# Altium PCB MCU Module V1.1(ASCII).PcbDoc
Units mm, origin at the board's own origin, x right, y up, seen from the top; angles counter-clockwise.
Board outline 50 x 50 mm, 4 copper layers (Top Layer, Layer 1, Layer 2, Bottom Layer), stack 1.57 mm thick; 48 components, 129 nets, 368 pads, 208 vias.
Unrouted connection lines stored in the file: 1.
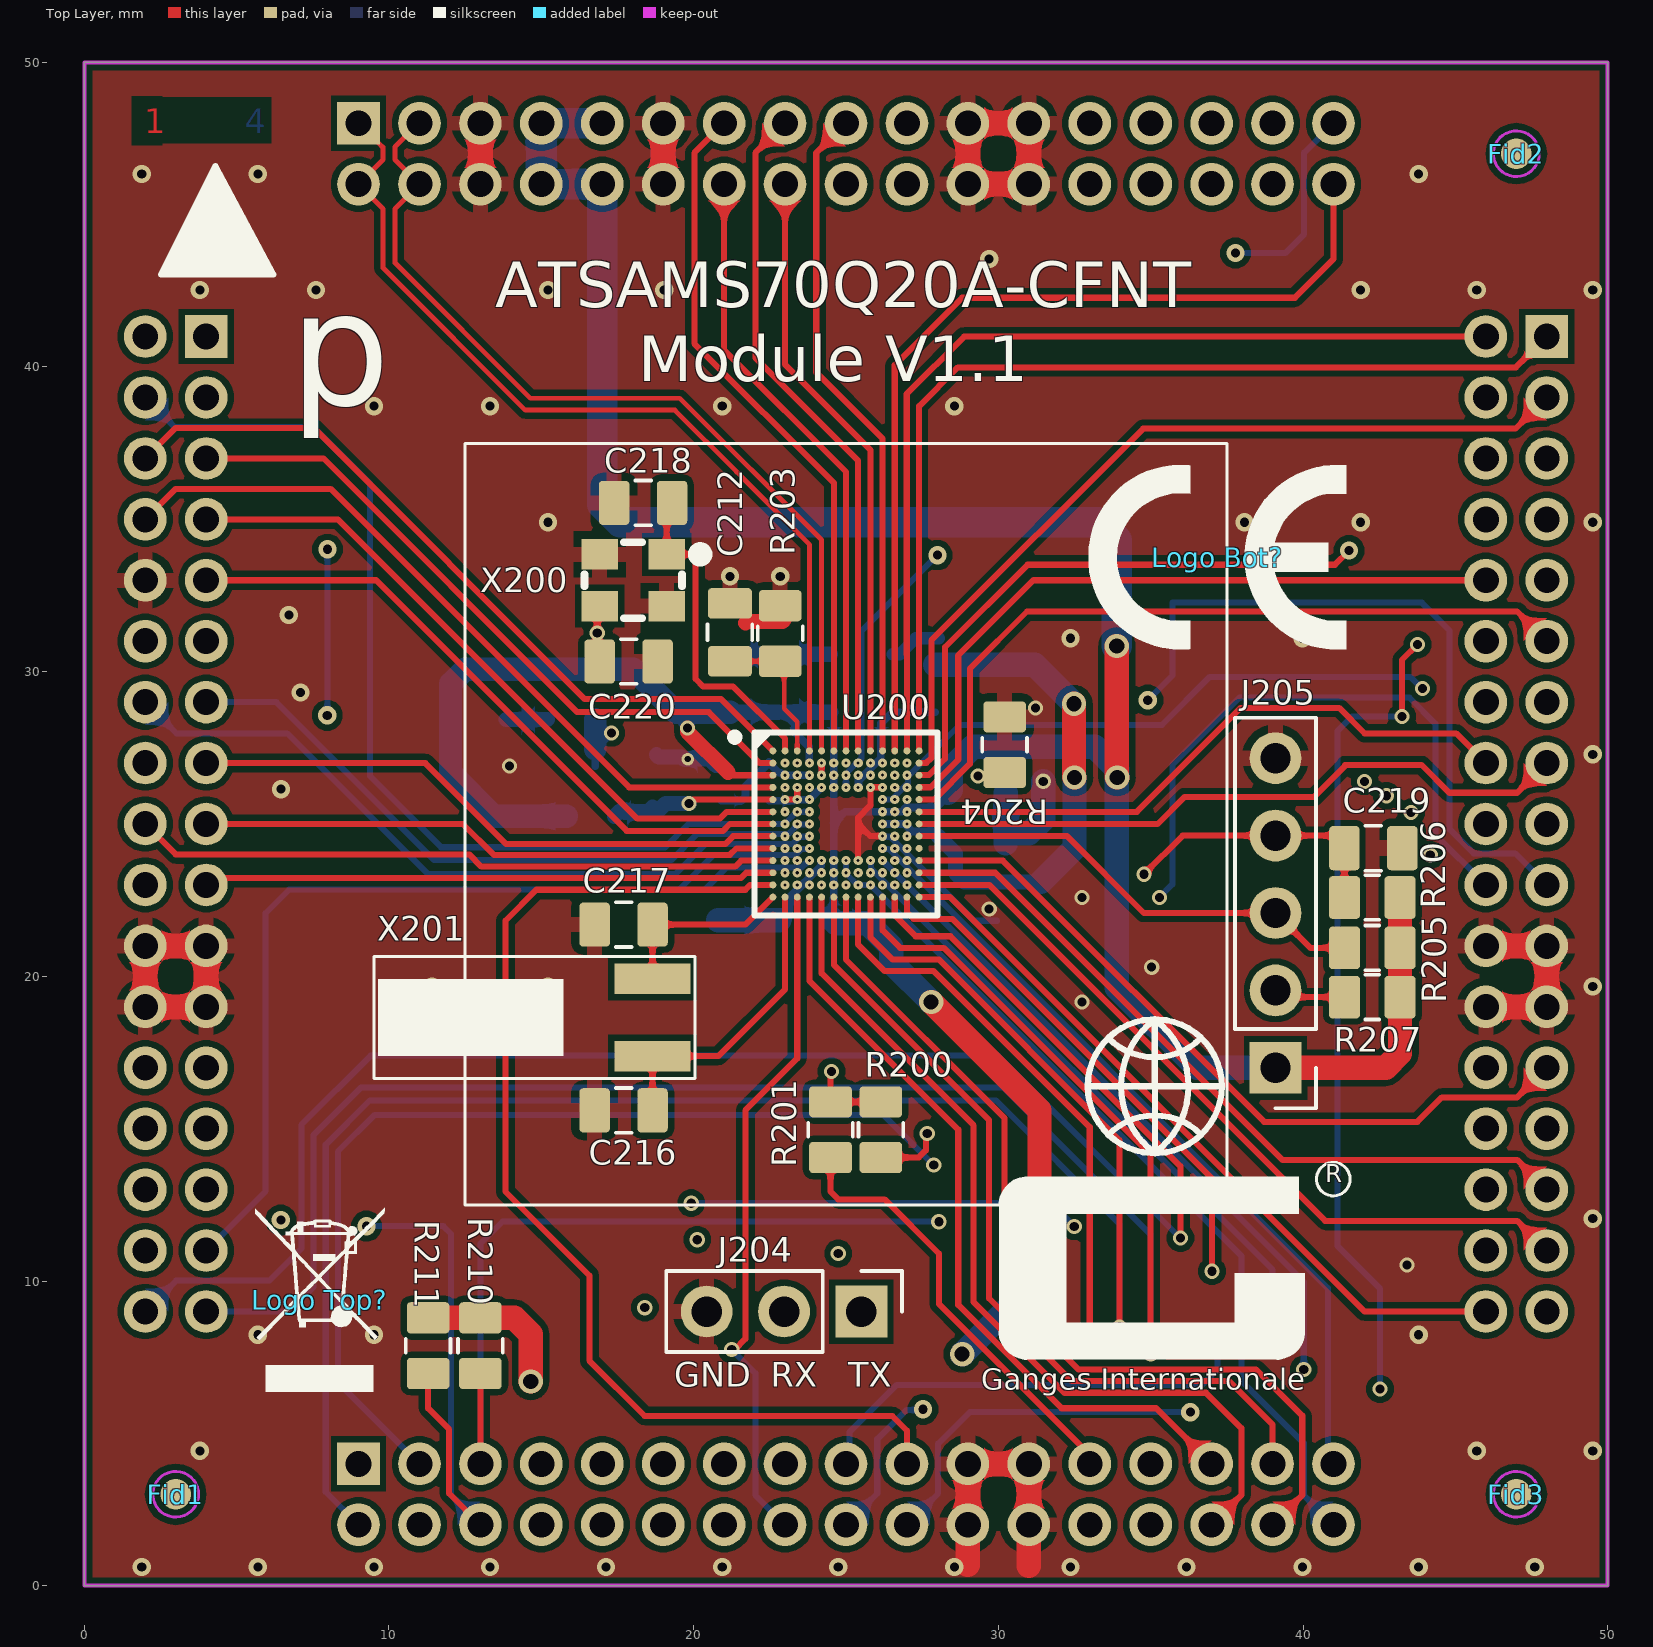
[diagram p0: Top Layer view]
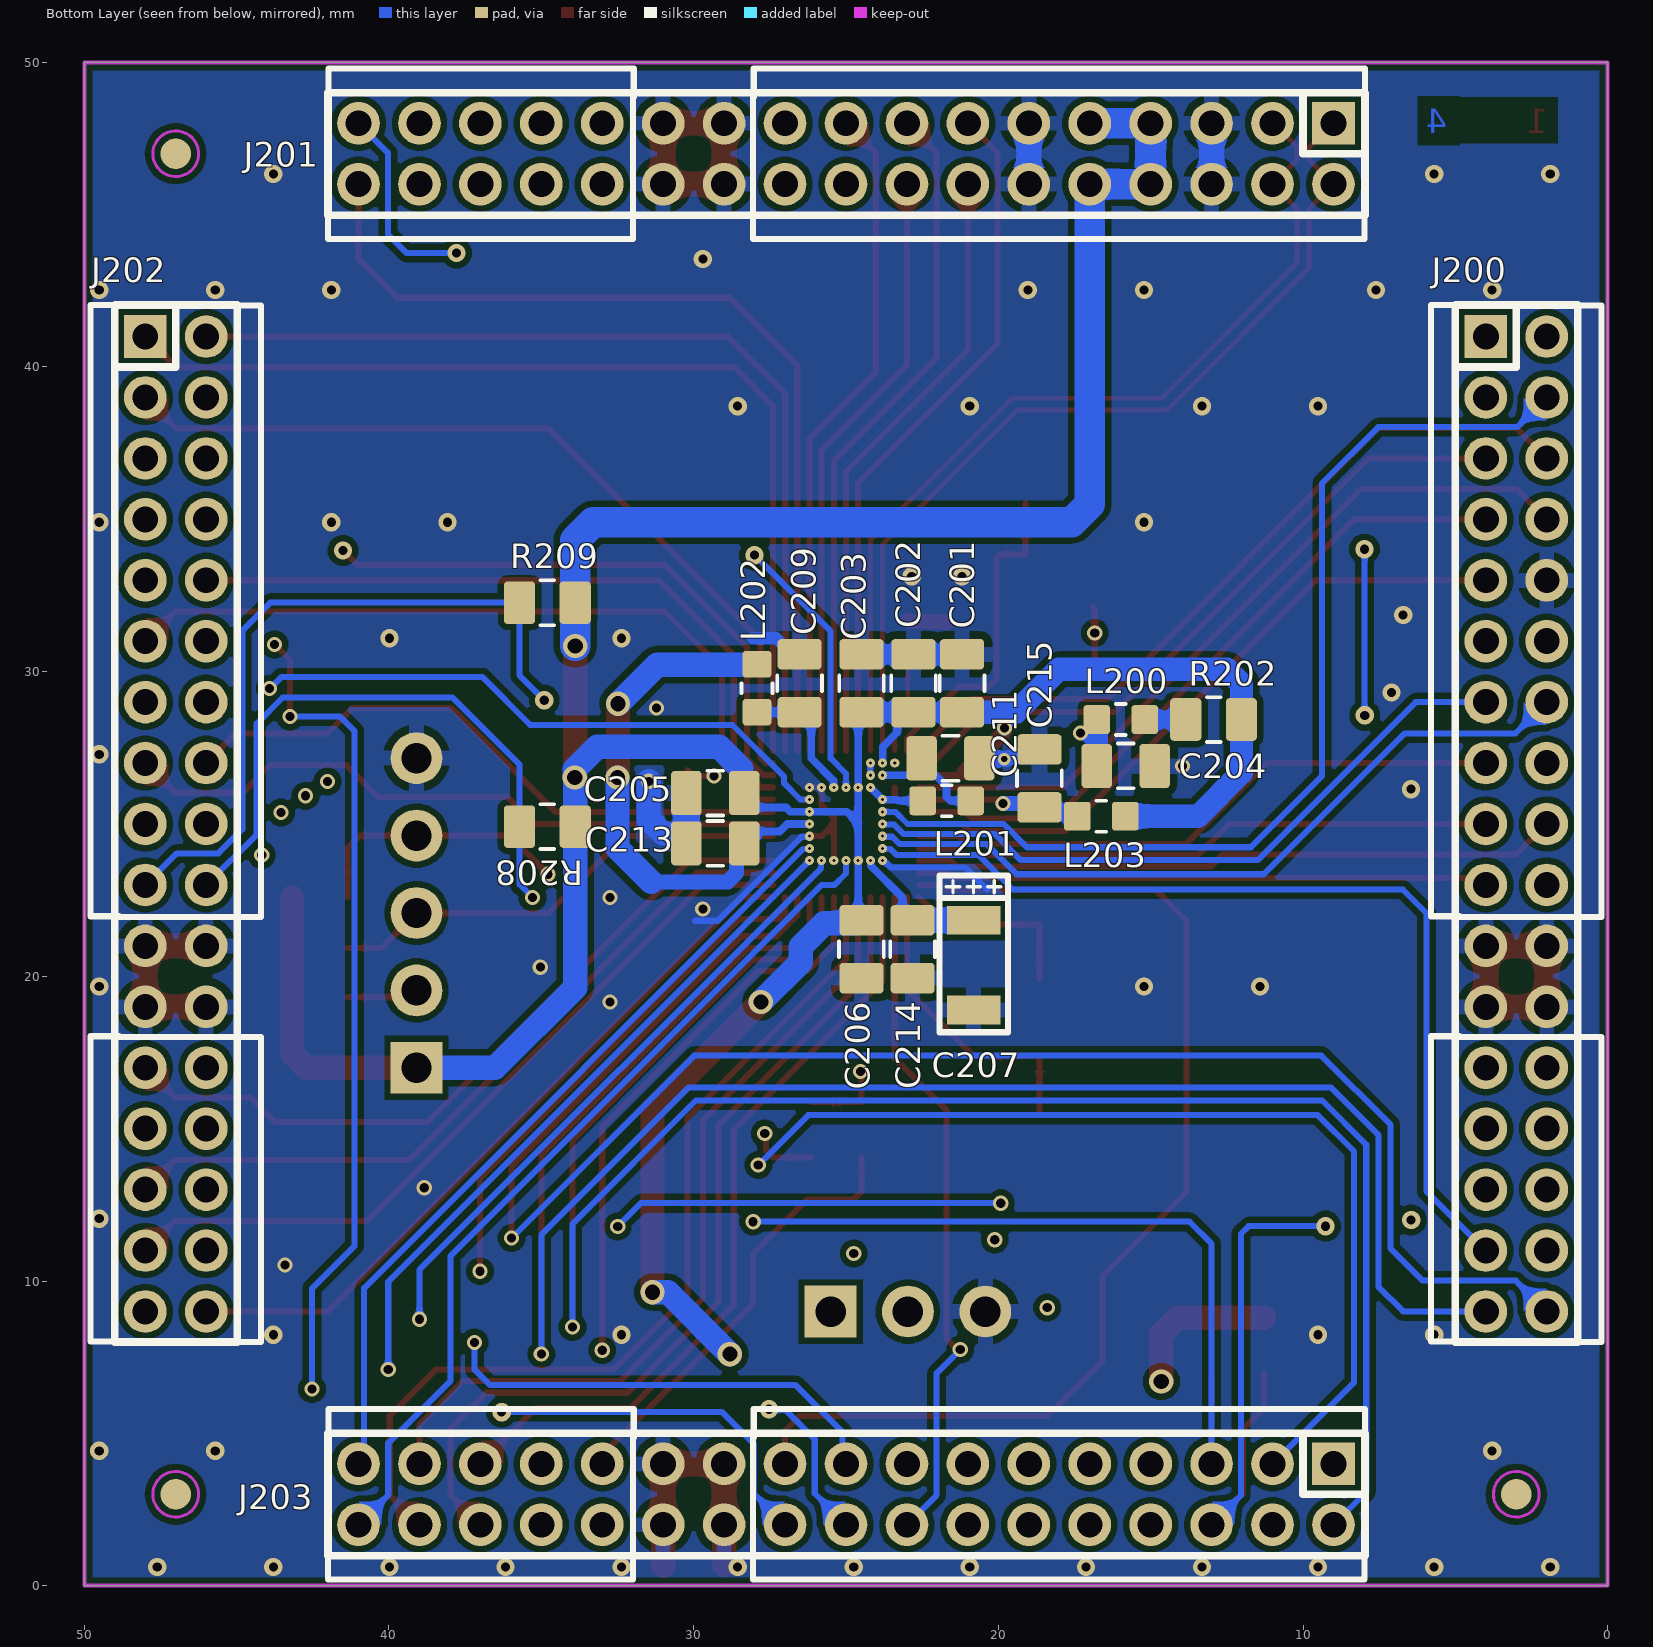
[diagram p1: Bottom Layer view, seen from below]
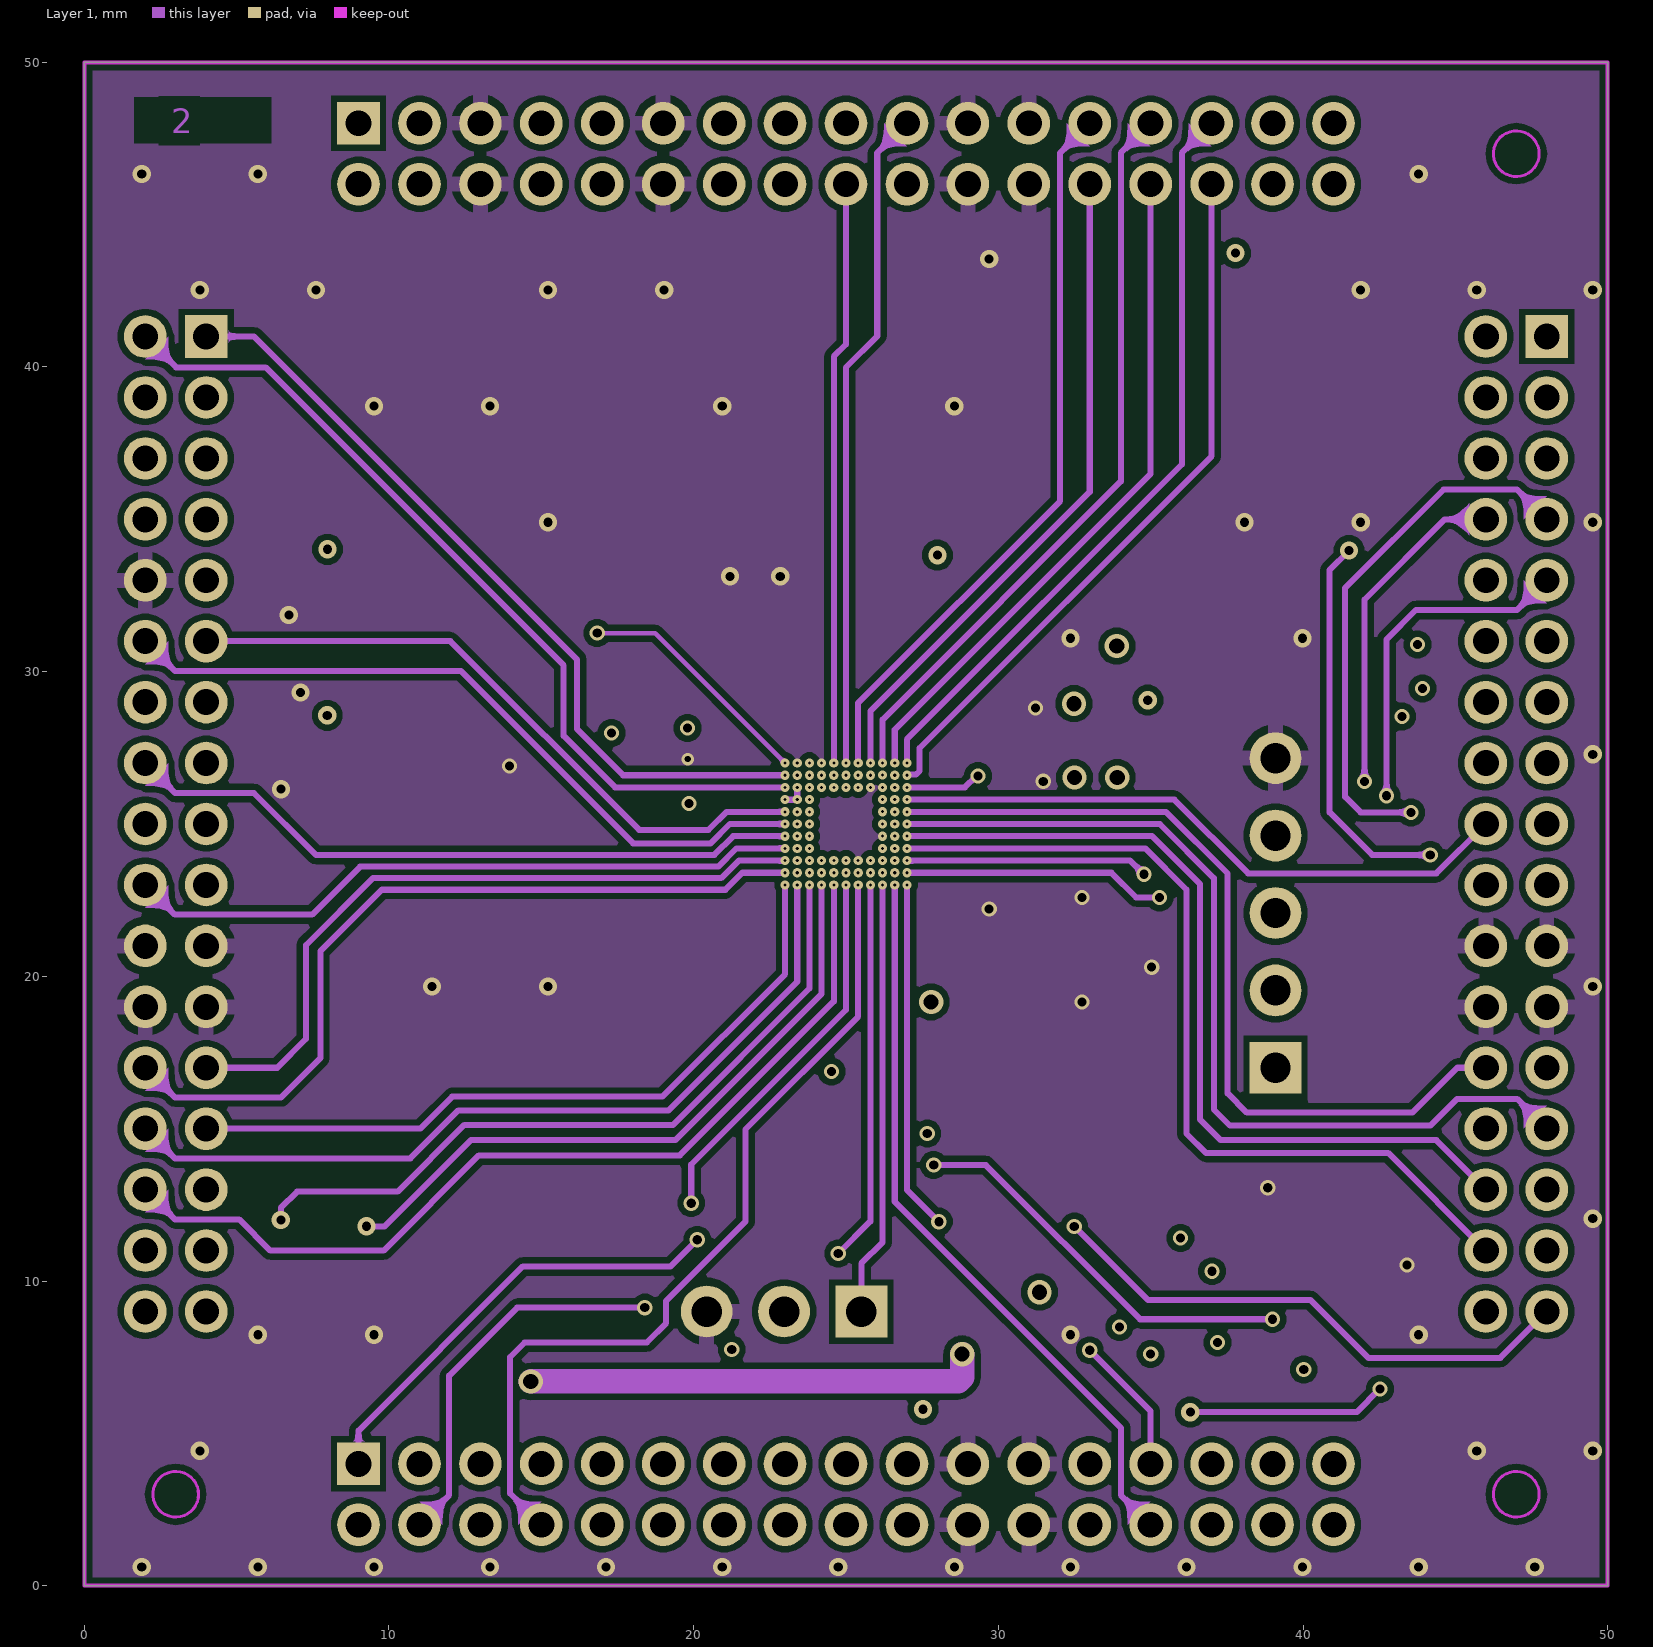
[diagram p2: Layer 1]
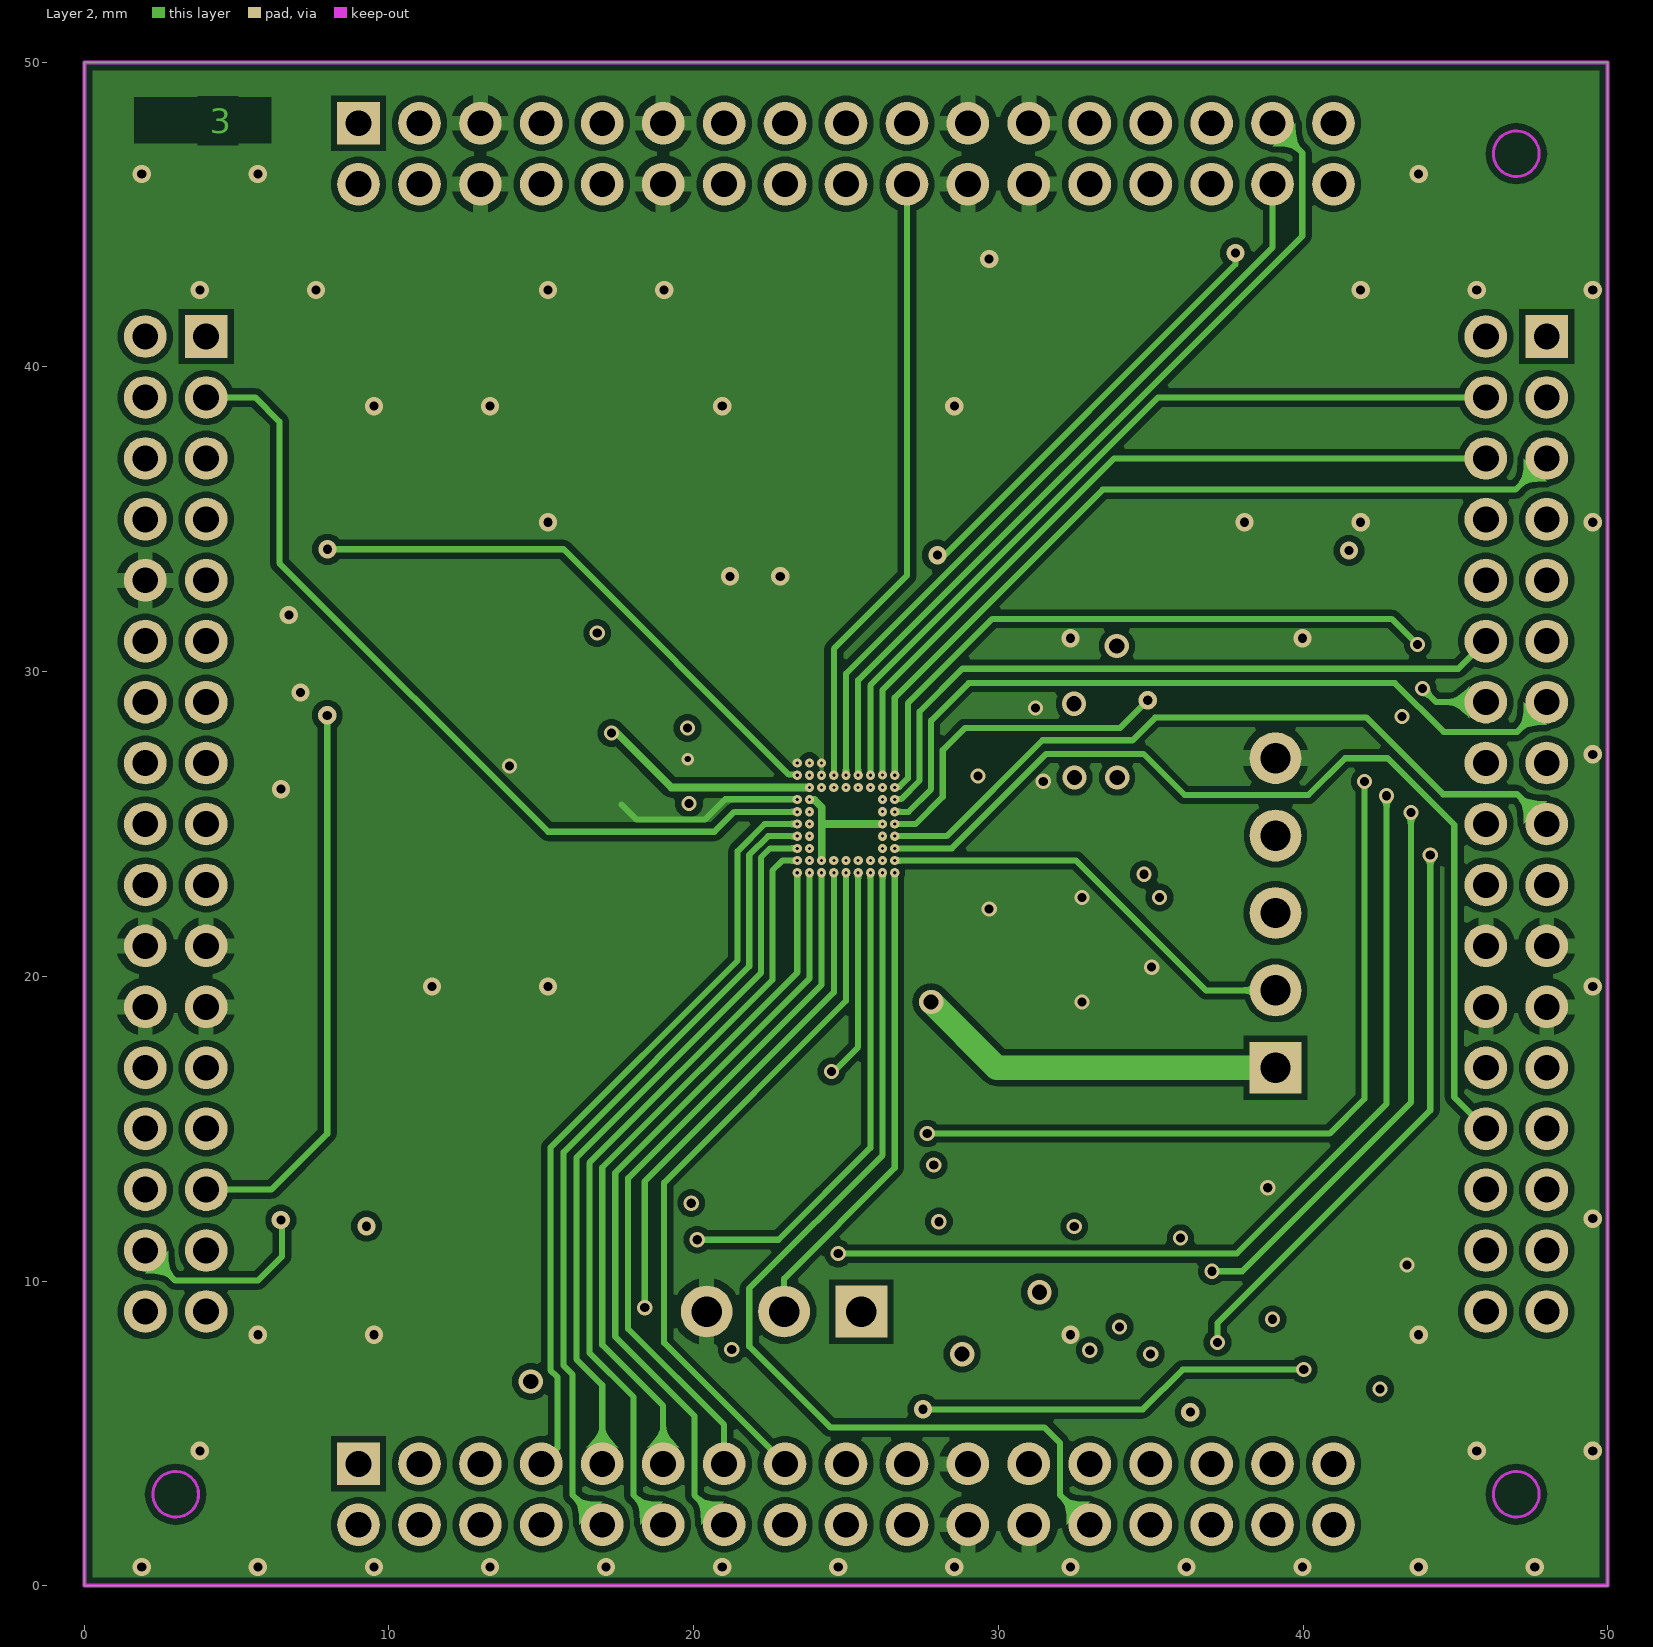
[diagram p3: Layer 2]

## Layer stack, top to bottom
Top Solder: solder mask 0.0127, Solder Resist, Dk 3.8
Top Layer: signal copper 0.035
Dielectric 2: prepreg 0.0175, PP-006, Dk 4.6
Layer 1: signal copper 0.2
Dielectric 1: dielectric 1.065, FR-4, Dk 4.6
Layer 2: signal copper 0.2
Dielectric 3: prepreg 0.0175, PP-006, Dk 4.6
Bottom Layer: signal copper 0.035
Bottom Solder: solder mask 0.0127, Solder Resist, Dk 3.8

## Board outline
0,0 0,50 50,50 50,0

## Design rules (kind name [scope] priority, off if disabled: settings)
Clearance Clearance_microvia [AsMM(ViaDiameter) = 0.3 vs AsMM(ViaDiameter) = 0.3] p1: gap=0.1 ignorepadtopadclearanceinfootprint=FALSE
Clearance Polygon_ANT [(InNamedPolygon('Top_Layer-GND')) or  (InNamedPolygon('Mid_Layer_1-GND')) or (InNamedPolygon('Mid_Layer_2-GND')) or (InNamedPolygon('Bottom_Layer-GND')) vs InNet('RF')] p2: gap=0.127 ignorepadtopadclearanceinfootprint=FALSE except(0: Arc-Hole Track-Hole SMDPad-Hole THPad-Hole Via-Hole Fill-Hole Poly-Hole Region-Hole Text-Hole)
Clearance Polygon [(InNamedPolygon('GND_L01_P000')) or  (InNamedPolygon('GND_L02_P001')) or (InNamedPolygon('GND_L03_P002')) or (InNamedPolygon('GND_L04_P003'))] p3: gap=0.2 ignorepadtopadclearanceinfootprint=FALSE
Clearance Clearance_Top [OnTopLayer] p4: gap=0.15 ignorepadtopadclearanceinfootprint=FALSE except(0.11: Arc-Via Track-Via; 0.12: Arc-Arc Arc-Track Track-Track; 0.13: SMDPad-Via)
Clearance [All] p5: gap=0.15 ignorepadtopadclearanceinfootprint=FALSE except(0.11: Arc-Via Track-Via; 0.12: Arc-Arc Arc-Track Track-Track)
ComponentClearance [All] p1 off: gap=0.254 collisioncheckmode=3 verticalgap=0.254 showdistances=FALSE
DiffPairsRouting DiffPairsRouting90 [All] p1: maxlimit=0.253 minlimit=0.253 mostfreqgap=0.253 toplayer_minwidth=0.139 toplayer_maxwidth=0.139 toplayer_prefwidth=0.139 midlayer1_minwidth=0.139 midlayer1_maxwidth=0.139 midlayer1_prefwidth=0.139 midlayer2_minwidth=0.139 midlayer2_maxwidth=0.139 midlayer2_prefwidth=0.139 bottomlayer_minwidth=0.139 bottomlayer_maxwidth=0.139 bottomlayer_prefwidth=0.139 maxuncoupledlength=12.7
FabricationTestPointUsage TestPointUsage [All] p1: valid=0 allowmultiple=FALSE
FabricationTestpoint Testpoint [All] p1: side=3 testpointundercomponent=TRUE minsize=1.016 maxsize=2.54 preferedsize=1.524 minholesize=0 maxholesize=1.016 preferedholesize=0.813 testpointgrid=0.025 allowsidetop=TRUE allowsidebottom=TRUE usegrid=TRUE gridtolerance=0
Height [All] p1 off: minheight=0 maxheight=25.4 prefheight=12.7
HoleSize [All] p1: absolutevalues=TRUE maxlimit=4.064 minlimit=0.1 maxpercent=80.000 minpercent=20.000
MinimumAnnularRing [All] p1 off: minimumring=0.152
MinimumSolderMaskSliver [All] p1: minsoldermaskwidth=0
PolygonConnect PolygonConnect_1 [isVia and innet(gnd)] p1: connectstyle=Direct reliefconductorwidth=0.254 reliefentries=4 polygonreliefangle="90 Angle" airgapwidth=0.254
PolygonConnect [All] p2: connectstyle=Relief reliefconductorwidth=0.508 reliefentries=4 polygonreliefangle="90 Angle" airgapwidth=0.254
RoomDefinition "MCU Module V1.1" [InComponentClass('MCU Module V1.1')] p1: confinementstyle=ConfineIn formatcopy=TRUE lockcomponents=FALSE outline -0.654,-0.4 50.908,-0.4 50.908,51.035 -0.654,51.035
RoutingVias [All] p1: holewidth=0.305 width=0.61 viastyle="Through Hole" minholewidth=0.3 minwidth=0.6 maxholewidth=0.7 maxwidth=1.27
SilkToSilkClearance [All] p1: silktosilkclearance=0
SilkToSolderMaskClearance SilkscreenOverComponentPads [IsPad] p1: minsilkscreentomaskgap=0 clearancetoexposedcopper=TRUE
SolderMaskExpansion SolderMaskExpansion_via [IsVia] p1: expansion=0.076 istentingtop=TRUE
SolderMaskExpansion [All] p2: expansion=0.076 istentingtop=FALSE
UnRoutedNet [All] p1: checkbadconnections=TRUE
Width [All] p1: maxlimit=2 minlimit=0.15 preferedwidth=0.254 minimp=50.000000 maximp=50.000000 favimp=50.000000
20 further rules are at their usual default settings.

## Classes and differential pairs
net class 90ohm: HSD_N HSD_P

## Components (designator, comment, footprint, x,y, rotation, side; value= is the part's Value field where it differs from the comment)
C201 "10uF" C_0805_2012METRIC 21.19,29.62 r90 bottom
C202 "100nF" C_0805_2012METRIC 22.784,29.62 r90 bottom
C203 "100nF" C_0805_2012METRIC 24.492,29.62 r90 bottom
C204 "4.7uF" C_0805_2012METRIC 15.82,26.905 r180 bottom
C205 "100nF" C_0805_2012METRIC 29.29,26.016 r0 bottom
C206 "100nF" C_0805_2012METRIC 24.493,20.89 r270 bottom
C207 "2.2uF" C_TAN_1206_3216METRIC 20.809,20.365 r270 bottom
C209 "100nF" C_0805_2012METRIC 26.524,29.62 r270 bottom
C211 "100nF" C_0805_2012METRIC 21.571,27.159 r180 bottom
C212 "10pF" C_0805_2012METRIC 21.19,31.291 r270 top
C213 "100nF" C_0805_2012METRIC 29.29,24.365 r0 bottom
C214 "100nF" C_0805_2012METRIC 22.813,20.89 r270 bottom
C215 "100nF" C_0805_2012METRIC 18.65,26.496 r270 bottom
C216 "12pF 2%" C_0805_2012METRIC 17.7,15.602 r0 top
C217 "12pF 2%" C_0805_2012METRIC 17.7,21.698 r0 top
C218 "12pF 2%" C_0805_2012METRIC 18.34,35.541 r0 top
C219 "10nF" C_0805_2012METRIC 42.31,24.206 r0 top
C220 "12pF 2%" C_0805_2012METRIC 17.865,30.334 r180 top
Fid1 "Fiducial mark" FIDUCIAL_1MM_MASK2MM 3,3 r90 top
Fid2 "Fiducial mark" FIDUCIAL_1MM_MASK2MM 47,47 r90 top
Fid3 "Fiducial mark" FIDUCIAL_1MM_MASK2MM 47,3 r90 top
J200 "Header 17X2" "HDR-TH_34P-P2.00-V-M-R2-C17-S2.00 - MALE" 3,25 r270 bottom
J201 "Header 17X2" "HDR-TH_34P-P2.00-V-M-R2-C17-S2.00 - MALE" 25,47 r0 bottom
J202 "Header 17X2" "HDR-TH_34P-P2.00-V-M-R2-C17-S2.00 - MALE" 47,25 r270 bottom locked
J203 "Header 17X2" "HDR-TH_34P-P2.00-V-M-R2-C17-S2.00 - MALE" 25,3 r0 bottom
J204 "Header 3" PINHEADER_1X03_P2.54MM_VERTICAL 22.968,8.998 r270 top
J205 "Header 5" PINHEADER_1X05_P2.54MM_VERTICAL 39.097,22.079 r180 top
L200 "10uH, 60mA" L_0603_1608METRIC 15.983,28.429 r180 bottom
L201 "470@100M" L_0603_1608METRIC 21.698,25.762 r0 bottom
L202 "470@100M" L_0603_1608METRIC 27.921,29.458 r90 bottom
L203 "470@100M" L_0603_1608METRIC 16.618,25.254 r180 bottom
"Logo Bot?" "Logo symbol" CE-Logo_8.5x6mm_SilkScreen 37.192,33.763 r0 top
"Logo Top?" "Logo symbol" WEEE-Logo_4.2x6mm_SilkScreen 7.728,9.379 r0 top
R200 "0R" R_0805_2012METRIC 26.143,14.967 r270 top
R201 "NC/0R" R_0805_2012METRIC 24.492,14.967 r270 top
R202 "2.2R" R_0805_2012METRIC 12.935,28.429 r180 bottom
R203 "5.62K 1%" R_0805_2012METRIC 22.841,31.253 r270 top
R204 "1K" R_0805_2012METRIC 30.207,27.603 r270 top
R205 "10K" R_0805_2012METRIC 42.272,20.936 r0 top
R206 "100K" R_0805_2012METRIC 42.272,22.587 r180 top
R207 "10K" R_0805_2012METRIC 42.272,19.317 r0 top
R208 "4.7K" R_0805_2012METRIC 34.803,24.914 r180 bottom
R209 "4.7K" R_0805_2012METRIC 34.803,32.264 r180 bottom
R210 "4.7K" R_0805_2012METRIC 13,7.879 r90 top
R211 "4.7K" R_0805_2012METRIC 11.284,7.879 r90 top
U200 "ATSAMS70Q20A-CFNT" UFBGA144(6X6MM) 25,25 r0 top locked
X200 "12MHz" CRY-3225 18.015,33.001 r0 top
X201 "32.768kHz" "CRYSTAL 1.8X6MMM" 18.65,18.65 r90 top

## Footprints (in the part's own frame and the unit in brackets; to place one, negate y for a bottom-side part, rotate by r counter-clockwise, add the part's x,y. Pads: shape width x height; smd on the part's side, far side on the other; paste and mask are expansions set on the pad)
C_0805_2012METRIC [mm]
  rrect25% 1x1.45 smd: 1(-0.95,0) 2(0.95,0)
  silkscreen extent -0.26,-0.73 0.26,0.73, body extent -1,-0.63 1,0.63, height 1
C_TAN_1206_3216METRIC [mm] "SMD capacitors: 3216-18 EIA Case 1206, polarized"
  rect 0.95x1.75 smd: 1(-1.475,0) 2(1.475,0)
  silkscreen extent -2.95,-1.13 2.2,1.13, body extent -1.6,-0.8 1.6,0.8, height 1.61
CE-Logo_8.5x6mm_SilkScreen [mm]
  silkscreen extent -4.23,-3.03 4.23,3.02
CRY-3225 [mm] "CRY-3225"
  rect 1.2x1 smd paste+0 mask+0.05: 1(1.1,0.85) 2(-1.1,0.85) 3(-1.1,-0.85) 4(1.1,-0.85)
  silkscreen extent -1.6,-1.25 2.4,1.25, body extent -1.6,-1.25 1.6,1.25, height 0.71
"CRYSTAL 1.8X6MMM" [mm]
  rect 1x2.5 smd: 1(-1.27,0) 2(1.27,0)
  silkscreen extent -2,-1.4 2,9.14, body extent -1.4,0 1.39,9, height 1.8
FIDUCIAL_1MM_MASK2MM [mm]
  round 1 smd mask+0.102: Un1(0,0)
  round 1 smd far side: Un1(0,0)
  Keep-Out Layer circle w0.1: c0,0 r0.75
"HDR-TH_34P-P2.00-V-M-R2-C17-S2.00 - MALE" [mm]
  rect 1.4x1.4 hole 0.85: 1(-16,-1)
  round 1.4 hole 0.85: 2(-16,1) 3(-14,-1) 4(-14,1) 5(-12,-1) 6(-12,1) 7(-10,-1) 8(-10,1) 9(-8,-1) 10(-8,1) 11(-6,-1) 12(-6,1) 13(-4,-1) 14(-4,1) 15(-2,-1) 16(-2,1) 17(0,-1) 18(0,1) 19(2,-1) 20(2,1) 21(4,-1) 22(4,1) 23(6,-1) 24(6,1) 25(8,-1) 26(8,1) 27(10,-1) 28(10,1) 29(12,-1) 30(12,1) 31(14,-1) 32(14,1) 33(16,-1) 34(16,1)
  silkscreen extent -17.04,-2.79 17,2.79, body extent -16.94,-2 17.06,2, height 6.01
L_0603_1608METRIC [mm]
  rrect25% 0.875x0.95 smd mask+0: 1(-0.788,0) 2(0.788,0)
  silkscreen extent -0.16,-0.51 0.16,0.51, body extent -0.8,-0.4 0.8,0.4, height 0.95
PINHEADER_1X03_P2.54MM_VERTICAL [mm]
  rect 1.7x1.7 hole 1: 1(0,2.54)
  rrect100% 1.7x1.7 hole 1: 2(0,0) 3(0,-2.54)
  silkscreen extent -1.33,-3.87 1.33,3.87, body extent -1.27,-3.81 1.27,3.81, height 9.5
PINHEADER_1X05_P2.54MM_VERTICAL [mm]
  rect 1.7x1.7 hole 1: 1(0,5.08)
  rrect100% 1.7x1.7 hole 1: 2(0,2.54) 3(0,0) 4(0,-2.54) 5(0,-5.08)
  silkscreen extent -1.33,-6.41 1.33,6.41, body extent -1.27,-6.35 1.27,6.35, height 9.5
R_0805_2012METRIC [mm]
  rrect24% 1.025x1.4 smd: 1(-0.913,0) 2(0.913,0)
  silkscreen extent -0.23,-0.73 0.23,0.73, body extent -1.15,-0.67 1.15,0.68, height 0.76
UFBGA144(6X6MM) [mm] "BGA, 144-Leads, Body 6.00x6.00mmx0.60mm, Pitch 0.40mm"
  round 0.229 smd: A1(-2.4,2.4) A2(-2,2.4) A3(-1.6,2.4) A4(-1.2,2.4) A5(-0.8,2.4) A6(-0.4,2.4) A7(0,2.4) A8(0.4,2.4) A9(0.8,2.4) A10(1.2,2.4) A11(1.6,2.4) A12(2,2.4) A13(2.4,2.4) B1(-2.4,2) B2(-2,2) B3(-1.6,2) B4(-1.2,2) B5(-0.8,2) B6(-0.4,2) B7(0,2) B8(0.4,2) B9(0.8,2) B10(1.2,2) B11(1.6,2) B12(2,2) B13(2.4,2) C1(-2.4,1.6) C2(-2,1.6) C3(-1.6,1.6) C4(-1.2,1.6) C5(-0.8,1.6) C6(-0.4,1.6) C7(0,1.6) C8(0.4,1.6) C9(0.8,1.6) C10(1.2,1.6) C11(1.6,1.6) C12(2,1.6) C13(2.4,1.6) D1(-2.4,1.2) D2(-2,1.2) D3(-1.6,1.2) D4(-1.2,1.2) D5(-0.8,1.2) D6(-0.4,1.2) D7(0,1.2) D8(0.4,1.2) D9(0.8,1.2) D10(1.2,1.2) D11(1.6,1.2) D12(2,1.2) D13(2.4,1.2) E1(-2.4,0.8) E2(-2,0.8) E3(-1.6,0.8) E4(-1.2,0.8) E10(1.2,0.8) E11(1.6,0.8) E12(2,0.8) E13(2.4,0.8) F1(-2.4,0.4) F2(-2,0.4) F3(-1.6,0.4) F4(-1.2,0.4) F10(1.2,0.4) F11(1.6,0.4) F12(2,0.4) F13(2.4,0.4) G1(-2.4,0) G2(-2,0) G3(-1.6,0) G4(-1.2,0) G10(1.2,0) G11(1.6,0) G12(2,0) G13(2.4,0) H1(-2.4,-0.4) H2(-2,-0.4) H3(-1.6,-0.4) H4(-1.2,-0.4) H10(1.2,-0.4) H11(1.6,-0.4) H12(2,-0.4) H13(2.4,-0.4) J1(-2.4,-0.8) J2(-2,-0.8) J3(-1.6,-0.8) J4(-1.2,-0.8) J10(1.2,-0.8) J11(1.6,-0.8) J12(2,-0.8) J13(2.4,-0.8) K1(-2.4,-1.2) K2(-2,-1.2) K3(-1.6,-1.2) K4(-1.2,-1.2) K5(-0.8,-1.2) K6(-0.4,-1.2) K7(0,-1.2) K8(0.4,-1.2) K9(0.8,-1.2) K10(1.2,-1.2) K11(1.6,-1.2) K12(2,-1.2) K13(2.4,-1.2) L1(-2.4,-1.6) L2(-2,-1.6) L3(-1.6,-1.6) L4(-1.2,-1.6) L5(-0.8,-1.6) L6(-0.4,-1.6) L7(0,-1.6) L8(0.4,-1.6) L9(0.8,-1.6) L10(1.2,-1.6) L11(1.6,-1.6) L12(2,-1.6) L13(2.4,-1.6) M1(-2.4,-2) M2(-2,-2) M3(-1.6,-2) M4(-1.2,-2) M5(-0.8,-2) M6(-0.4,-2) M7(0,-2) M8(0.4,-2) M9(0.8,-2) M10(1.2,-2) M11(1.6,-2) M12(2,-2) M13(2.4,-2) N1(-2.4,-2.4) N2(-2,-2.4) N3(-1.6,-2.4) N4(-1.2,-2.4) N5(-0.8,-2.4) N6(-0.4,-2.4) N7(0,-2.4) N8(0.4,-2.4) N9(0.8,-2.4) N10(1.2,-2.4) N11(1.6,-2.4) N12(2,-2.4) N13(2.4,-2.4)
  silkscreen extent -12.5,-12.51 12.5,12.49, body extent -3,-3 3,3, height 0.61
WEEE-Logo_4.2x6mm_SilkScreen [mm]
  silkscreen extent -2.11,-3.02 2.13,3.02

## Part data
C201: library part "Cap Semi", "CAP CER 10UF 6.3V X5R 0805"
C202 C203 C205 C206 C209 C211 C213 C214 C215: library part "Cap Semi", "CAP CER 0.1UF 25V X7R 0805"
C204: library part "Cap Semi", "CAP CER 4.7UF 10V X5R 0805"
C207: library part A01-0492, "Capacitor Tantalum 10V 2.2uF 10% ESR = 6 ohm"
C212: library part "Cap Semi", "CAP CER 10PF 100V C0G/NP0 0805"
C216 C217 C218 C220: library part "Cap Semi", "CAP CER 12PF 50V C0G/NP0 0805"
C219: library part "Cap Semi", "CAP CER 10000PF 10V X7R 0805"
Fid1 Fid2 Fid3: library part Fiducial, "Fiducial Mark"
J200 J201 J202 J203: "Header, 17-Pin, Dual row"
J204: "Header, 3-Pin"
J205: "CONN HEADER VERT 5POS 2MM"
L200: library part A03-0035, "FIXED IND 10UH 60MA 700 MOHM SMD"
L201 L202 L203: library part FB-M1331, "FERRITE BEAD 470 OHM 0603 1LN"
"Logo Bot?" "Logo Top?": library part Logo, "Schematic symbol for Logo"
R200 R201: library part Res2, "RES 0 OHM JUMPER 1/8W 0805"
R202: library part Res2, "RES 2.2 OHM 5% 1/8W 0805"
R203: library part Res2, "RES 5.62K OHM 1% 1/8W 0805"
R204: library part Res2, "RES 1K OHM 1% 1/8W 0805"
R205 R207: library part Res2, "RES 10K OHM 5% 1/8W 0805"
R206: library part Res2, "RES 100K OHM 5% 1/8W 0805"
R208 R209 R210 R211: library part Res2, "RES 4.7K OHM 5% 1/8W 0805"
U200: "32-bit ARM Cortex-M7 MCUs with FPU, Audio andGraphics Interfaces, High-Speed USB, Ethernet, andAdvanced Analog"
X200: library part A07-0042, "CRYSTAL 12.0000MHZ 18PF SMD"
X201: library part A07-0052, "CRYSTAL 32.7680KHZ 12.5PF SMD"

## Via types
v1: diameter 0.6, hole 0.3, Top Layer to Bottom Layer, tented both sides, 61 vias
v2: diameter 0.5, hole 0.3, Top Layer to Bottom Layer, tented both sides, 42 vias
v3: diameter 0.3, hole 0.1, Top Layer to Layer 1, tented both sides, 38 vias
v4: diameter 0.3, hole 0.1, Top Layer to Layer 2, tented both sides, 30 vias
v5: diameter 0.3, hole 0.1, Top Layer to Bottom Layer, tented both sides, 28 vias
v6: diameter 0.8, hole 0.5, Top Layer to Bottom Layer, tented both sides, 8 vias
v7: diameter 0.406, hole 0.203, Top Layer to Bottom Layer, tented both sides, 1 vias

## Nets (pads, with @x,y where several pads share a name; then routed paths per layer and width w, separated by ;. In a path a pad name is that pad's centre, name@x,y a point inside that pad or via, vN(x,y) a via of type N, cw(c..) or ccw(c..) an arc to the next point about the centre after c; other vN are vias at no path point)
ADVREF: C215.2 L203.1 U200.E1 | length 5.5
  Top Layer w0.2: v2(19.85,25.675) 19.975,25.8 U200.E1
  Bottom Layer w0.5: L203.1 17.552,25.4 18.504,25.4 C215.2 18.801,25.395 19.081,25.675 v2(19.85,25.675)
CTS0: J200.18 U200.K1 | length 21.3
  Top Layer w0.2: J200.18 3,24 12.635,24 13.035,23.6 21.36,23.6 21.56,23.8 U200.K1
CTS1: J203.25 R201.2 | length 14.5
  Top Layer w0.2: R201.2 24.492,12.935 24.746,12.681 26.27,12.681 28.048,10.903 28.048,9.252 33,4.3 J203.25
CTS2: J203.26 U200.L10 | length 32
  Layer 2 w0.2: v4(26.2,23.4) 26.2,14.135 21.825,9.76 21.825,7.855 24.492,5.188 31.517,5.188 32.025,4.68 32.025,2.975 J203.26
GND: C201.2 C202.2 C203.2 C204.2 C205.2 C206.2 C207.2 C209.1 C211.2 C212.1 C213.2 C214.2 C215.1 C216.1 C217.1 C218.1 C219.2 C220.1 J200.10 J200.21 J200.22 J200.23 J200.24 J201.5 J201.6 J201.11 J201.12 J201.21 J201.22 J201.23 J201.24 J202.21 J202.22 J202.23 J202.24 J203.21 J203.22 J203.23 J203.24 J204.3 J205.5 R203.1 R204.1 U200.B3 U200.B5 U200.C5 U200.D3 U200.D9 U200.D10 U200.E2 U200.E3 U200.H10 U200.K4 U200.K8 X200.2 X200.4 | length 72.8
  Top Layer w0.2: v3(23,25.8) v4(23.4,25.8) v3(23.4,26.2) ; v5(24.2,26.6) v5(24.2,27) ; v5(25.4,23.8) 25.4,25 ; v5(26.2,24.6) 26.194,24.606 25.794,24.606 25.4,25 ; v5(26.2,26.204) 26.196,26.2 v5(25.8,26.2) 25.8,25.611 25.4,25.211 25.4,25
  Top Layer w0.5: 21.698,31.597 21.748,31.647 22.918,31.647 R203.1@22.968,31.697
  Top Layer w0.8: J201.6 J201.5 ; J201.12 J201.11 ; 29,0.68 J203.22 J203.21 J203.23 J203.24 31,0.647 ; J202.24 J202.23 J202.21 J202.22 ; J200.24 J200.22 J200.21 J200.23 J200.24 ; J201.22 J201.24 J201.23 J201.21 J201.22
  Layer 1 w0.2: v3(23,25.8) v4(23.4,25.8) v3(23.4,26.2)
  Layer 2 w0.2: 17.634,25.635 18.119,25.15 20.375,25.15 21.037,25.812 23.388,25.812 v4(23.4,25.8)
  Bottom Layer w0.2: 20.365,22.848 21.09,23.573 23.546,23.573 23.773,23.8 v5(23.8,23.8) ; v5(24.2,26.6) v5(24.2,27) ; v5(25.4,23.8) v5@25.419,23.819 ; v5(26.2,24.6) 26.219,24.581 26.457,24.581 29.213,21.825 29.953,21.825
  Bottom Layer w0.4: C209.1 26.763,30.57 27.289,31.096 28.048,31.096
  Bottom Layer w0.5: C215.1@18.777,27.271 18.852,27.196 19.606,27.196 19.671,27.131 v7(19.804,27.131) 20.523,27.131 C211.2@20.729,26.926 ; C201.2 C203.2
  Bottom Layer w0.8: J201.6 J201.5 ; J201.12 J201.11 ; C213.2 C213.2@30.24,24.59 ; C205.2 C213.2@30.24,24.59 ; v2(31.475,26.4) 31.477,26.398 31.477,25.159 31.008,24.69 30.34,24.69 C213.2@30.24,24.59
  other v1: 1.886,0.616 5.696,0.616 9.506,0.616 13.316,0.616 17.126,0.616 20.936,0.616 24.746,0.616 28.556,0.616 32.366,0.616 36.176,0.616 39.986,0.616 43.796,0.616 47.606,0.616 3.791,4.426 45.701,4.426 49.511,4.426 5.696,8.236 9.506,8.236 32.366,8.236 43.796,8.236 49.511,12.046 11.411,19.666 15.221,19.666 49.511,19.666 6.458,26.143 49.511,27.286 7.093,29.318 32.366,31.096 39.986,31.096 6.712,31.858 21.19,33.128 22.841,33.128 15.221,34.906 38.081,34.906 41.891,34.906 49.511,34.906 9.506,38.716 13.316,38.716 20.936,38.716 28.556,38.716 3.791,42.526 7.601,42.526 15.221,42.526 19.031,42.526 41.891,42.526 45.701,42.526 49.511,42.526 29.699,43.542 1.886,46.336 5.696,46.336 43.796,46.336
  other v2: 43.415,10.522 38.843,13.062 32.747,19.158 35.033,20.301 29.699,22.206 32.747,22.587 13.951,26.905 31.223,28.81
  other v5: 23.4,27
HSD_N: J201.3 J201.4 U200.A5 | length 30.3
  Top Layer w0.16: J201.3 10.971,48 10.196,47.225 10.196,46.804 J201.4 10.196,45.196 10.196,43.415 14.635,38.975 19.544,38.975 24.196,34.324 24.196,27.404 U200.A5
HSD_P: J201.1 J201.2 U200.A4 | length 30.3
  Top Layer w0.16: J201.1 9.775,47.225 9.804,47.225 9.804,46.804 J201.2 9.804,45.196 9.804,43.253 14.473,38.584 19.382,38.584 21.409,36.557 21.686,36.28 23.804,34.162 23.804,27.468 23.8,27.464 U200.A4
MCCDA: J202.5 U200.C11 | length 27.2
  Layer 2 w0.2: v4(26.6,26.6) 26.6,29.15 33.425,35.975 46.975,35.975 J202.5
MCCK: J202.8 R200.2 | length 38.4
  Top Layer w0.2: R200.2 27.39,14.055 27.625,14.29 27.625,14.798 v2(27.667,14.84)
  Layer 1 w0.2: v2(42.018,26.397) 42.018,32.366 44.652,35 J202.8
  Layer 2 w0.2: v2(27.667,14.84) 40.875,14.84 42.018,15.983 v2(42.018,26.397)
MCDA0: J201.34 U200.A11 | length 31
  Top Layer w0.2: U200.A11 26.6,40.062 28.81,42.272 39.732,42.272 41,43.54 J201.34
MCDA1: J202.6 U200.C10 | length 25.7
  Layer 2 w0.2: v4(26.2,26.604) 26.2,29.4 33.8,37 J202.6
MCDA2: J202.9 U200.M9 | length 53.9
  Layer 1 w0.2: v2(24.746,10.903) 25.8,11.957 v3(25.8,23) ; v2(42.743,25.926) 42.743,31.059 43.709,32.025 47.025,32.025 J202.9
  Layer 2 w0.2: v2(24.746,10.903) 37.827,10.903 42.743,15.819 v2(42.743,25.926)
MCDA3: J202.7 U200.N12 | length 53.1
  Top Layer w0.2: U200.N12 27,22.111 27.223,21.889 28.493,21.889 37.012,13.369 v2(37.012,10.321)
  Layer 1 w0.2: v2(43.542,25.381) 41.891,25.381 41.383,25.889 41.383,32.747 44.611,35.975 47.025,35.975 J202.7
  Layer 2 w0.2: v2(37.012,10.321) 38.007,10.321 43.542,15.856 v2(43.542,25.381)
MCDETECT: J202.10 U200.D13 | length 23.4
  Top Layer w0.2: U200.D13 27.406,26.206 27.778,26.206 28.683,27.111 28.683,30.533 31.15,33 J202.10
NetL200_2: L200.2 R202.1 | length 1.3
  Bottom Layer w0.5: R202.1 L200.2
NetR204_2: R204.2 U200.D12 | length 3.4
  Top Layer w0.2: v2(29.332,26.575) 30.004,26.575 R204.2@30.207,26.778
  Layer 1 w0.2: v3(27,26.2) 28.904,26.2 29.278,26.575 v2(29.332,26.575)
PA0: J202.12 U200.E11 | length 22.9
  Layer 2 w0.2: v4(26.6,25.8) 26.619,25.819 26.809,25.819 27.413,26.423 27.413,28.688 28.822,30.097 45.097,30.097 J202.12
PA1: J202.13 U200.F11 | length 25.5
  Layer 2 w0.2: v4(26.6,25.4) 27.051,25.4 27.794,26.143 27.794,28.394 29.025,29.625 43.018,29.625 44.618,28.025 47.025,28.025 J202.13
PA2: J202.27 U200.G12 | length 30.3
  Layer 1 w0.2: v3(27,25) 35.3,25 37.075,23.225 37.075,15.629 37.604,15.1 44.183,15.1 45.058,15.975 47.025,15.975 J202.27
PA6: J201.28 U200.B11 | length 22.5
  Layer 1 w0.2: v3(26.6,27) 26.6,28.094 35,36.494 J201.28
PA15: J203.31 U200.N6 | length 27.6
  Top Layer w0.2: U200.N6 24.6,20.375 29.699,15.276 29.699,9.426 32.413,6.712 37.573,6.712 39,5.285 J203.31
PA16: J203.14 U200.L4 | length 25.5
  Layer 2 w0.2: J203.14 20.025,2.975 20.025,5.575 17.425,8.175 17.425,13.55 23.8,19.925 v4(23.8,23.4)
PA18: J203.9 U200.J3 | length 24.1
  Layer 2 w0.2: J203.9 17,6.584 16.15,7.434 16.15,14.05 22.206,20.106 22.206,23.9 22.506,24.2 v4(23.4,24.2)
PA19: J200.20 U200.J2 | length 22.3
  Layer 1 w0.2: J200.20 2.975,22.025 7.475,22.025 9.053,23.603 20.809,23.603 21.406,24.2 v3(23,24.2)
PA20: J200.17 U200.J1 | length 19.1
  Top Layer w0.2: J200.17 12.427,25 13.443,23.984 21.19,23.984 21.406,24.2 U200.J1
PA22: J200.27 U200.M2 | length 24
  Layer 1 w0.2: J200.27 11.025,15 12.075,16.05 18.975,16.05 23,20.075 v3(23,23)
PA23: J203.30 U200.N5 | length 29.4
  Top Layer w0.2: U200.N5 24.2,20.1 29.191,15.109 29.191,9.309 32.169,6.331 36.811,6.331 37.975,5.167 37.975,2.975 J203.30
PA25: R200.1 R201.1 U200.L8 | length 9.6
  Top Layer w0.2: v2(24.525,16.875) 24.492,16.842 R201.1 R200.1
  Layer 2 w0.2: v2(24.525,16.875) 24.597,16.875 25.4,17.678 v4(25.4,23.4)
PA29: J201.14 U200.A7 | length 20.3
  Top Layer w0.2: J201.14 21,40.557 25,36.557 U200.A7
PB5: J201.30 U200.C12 | length 23.7
  Layer 1 w0.2: v3(27,26.6) 27.019,26.619 27.296,26.619 27.413,26.736 27.413,27.488 37,37.075 J201.30
PB12: J203.33 U200.J10 | length 26.4
  Bottom Layer w0.2: v5(26.2,24.2) 26.219,24.181 26.397,24.181 40.815,9.763 40.815,4.185 J203.33
PB13: J200.6 U200.A1 | length 25.4
  Top Layer w0.2: J200.6 3,38 7.525,38 16.425,29.1 20.9,29.1 U200.A1
PC0: J200.11 U200.F2 | length 21.8
  Layer 1 w0.2: J200.11 12.015,31 18.21,24.805 20.487,24.805 21.082,25.4 v3(23,25.4)
PC1: J200.28 U200.M3 | length 27.4
  Layer 1 w0.2: J200.28 2.975,14.025 10.7,14.025 12.275,15.6 19.175,15.6 23.4,19.825 v3(23.4,23)
PC2: J203.16 U200.N3 | length 22.3
  Top Layer w0.2: v2(21.25,7.75) 21.343,7.75 21.698,8.105 21.698,15.602 23.4,17.304 U200.N3
  Bottom Layer w0.2: v2(21.25,7.75) 22.025,6.975 22.025,2.975 J203.16
PC3: J203.29 U200.N4 | length 25.9
  Top Layer w0.2: U200.N4 23.8,19.85 28.683,14.967 28.683,9.217 32.077,5.823 35.177,5.823 J203.29
PC4: J203.11 U200.L3 | length 22.9
  Layer 2 w0.2: J203.11 19,5.902 17,7.902 17,13.725 23.4,20.125 v4(23.4,23.4)
PC5: J203.8 U200.M8 | length 28.5
  Layer 1 w0.2: J203.8 13.972,3.028 13.972,7.497 14.457,7.982 18.463,7.982 19.098,8.617 19.098,9.347 21.698,11.947 21.698,14.973 25.4,18.675 v3(25.4,23)
PC6: J203.15 U200.L7 | length 23.5
  Layer 2 w0.2: J203.15 19.031,7.969 19.031,13.231 25,19.2 v4(25,23.4)
PC7: J203.13 U200.L5 | length 23.3
  Layer 2 w0.2: J203.13 21,5.275 17.85,8.425 17.85,13.375 24.2,19.725 v4(24.2,23.4)
PC8: J202.25 U200.K13 | length 24.9
  Top Layer w0.2: U200.K13 30.15,23.8 38.729,15.221 43.754,15.221 44.558,16.025 47.025,16.025 J202.25
PC9: J202.28 U200.J11 | length 32
  Layer 2 w0.2: v4(26.6,24.2) 28.474,24.2 31.574,27.3 34.765,27.3 36.113,25.952 40.176,25.952 41.383,27.159 42.78,27.159 44.964,24.975 44.964,16.036 J202.28
PC10: J202.30 U200.H12 | length 28.3
  Layer 1 w0.2: v3(27,24.6) 35.05,24.6 36.625,23.025 36.625,15.3 37.3,14.625 44.375,14.625 J202.30
PC11: J202.16 U200.F13 | length 20.8
  Top Layer w0.2: U200.F13 34.544,25.4 37.954,28.81 41.183,28.81 42.018,27.975 45.025,27.975 J202.16
PC12: J200.12 U200.G2 | length 24
  Layer 1 w0.2: J200.12 2.975,30.025 12.357,30.025 18.017,24.365 20.555,24.365 21.19,25 v3(23,25)
PC13: J203.10 U200.H3 | length 26.9
  Layer 2 w0.2: J203.10 16.025,2.975 16.025,6.925 15.729,7.221 15.729,14.229 21.825,20.325 21.825,23.984 22.441,24.6 v4(23.4,24.6)
PC14: J202.26 U200.F12 | length 27.9
  Layer 1 w0.2: v3(27,25.4) 35.5,25.4 37.525,23.375 37.525,16.158 38.158,15.525 43.592,15.525 45.067,17 J202.26
PC15: J200.14 U200.H4 | length 24.7
  Bottom Layer w0.2: J200.14 3.025,27.975 6.658,27.975 11.283,23.35 19.4,23.35 20.4,24.35 23.25,24.35 23.481,24.581 23.781,24.581 v5(23.8,24.6)
PC16: J202.18 U200.E12 | length 20.7
  Layer 1 w0.2: v3(27,25.8) 35.775,25.8 38.196,23.379 44.379,23.379 J202.18
PC17: J202.14 U200.E10 | length 21.9
  Layer 2 w0.2: v2(43.923,29.445) 44.368,29 J202.14
  Bottom Layer w0.2: v5(26.2,25.804) 26.504,25.804 27.032,26.331 27.032,26.557 28.725,28.25 35.362,28.25 36.938,29.826 43.526,29.826 43.907,29.445 v2(43.923,29.445)
PC18: J201.29 U200.B12 | length 25.1
  Layer 1 w0.2: v3(27,27) 27,27.775 36.025,36.8 36.025,47.025 J201.29
PC19: J201.27 U200.B10 | length 24.6
  Layer 1 w0.2: v3(26.2,27.004) 26.2,28.425 34.025,36.25 34.025,47.025 J201.27
PC20: J202.4 U200.C9 | length 27.1
  Layer 2 w0.2: v4(25.8,26.6) 25.8,29.55 35.25,39 J202.4
PC21: J201.16 U200.A9 | length 19.8
  Top Layer w0.2: J201.16 23,40.081 25.8,37.281 U200.A9
PC22: J201.15 U200.A8 | length 22.4
  Top Layer w0.2: J201.15 22.025,47.025 22.025,40.3 25.4,36.925 U200.A8
PC23: J201.32 U200.C7 | length 25.2
  Layer 2 w0.2: v4(25,26.6) 25,29.931 39,43.931 J201.32
PC29: J200.9 U200.G1 | length 22.1
  Top Layer w0.2: J200.9 9.575,33 17.8,24.775 20.965,24.775 21.19,25 U200.G1
PC30: J203.7 U200.G3 | length 25.3
  Layer 2 w0.2: J203.7 15.525,4.525 15.525,6.85 15.3,7.075 15.3,14.375 21.444,20.519 21.444,24.111 22.333,25 v4(23.4,25)
PC31: J200.13 U200.G4 | length 22.4
  Bottom Layer w0.2: J200.13 6.3,29 11.475,23.825 19.275,23.825 20.125,24.675 23.115,24.675 23.421,24.981 23.781,24.981 v5(23.8,25)
PD0: J200.5 U200.B1 | length 22.7
  Top Layer w0.2: J200.5 7.85,37 16.18,28.67 20.496,28.67 22.166,27 U200.B1
PD1: J201.18 U200.B6 | length 19.2
  Layer 1 w0.2: v3(24.6,27) 24.6,40.348 25,40.748 J201.18
PD2: J201.13 U200.A6 | length 22.9
  Top Layer w0.2: J201.13 20.025,47.025 20.025,40.77 24.6,36.195 U200.A6
PD3: J201.19 U200.B7 | length 21.8
  Layer 1 w0.2: v3(25,27) 25,39.986 26.025,41.011 26.025,47.025 J201.19
PD4: J201.31 U200.C8 | length 27.8
  Layer 2 w0.2: v4(25.4,26.6) 25.4,29.718 39.975,44.293 39.975,47.025 J201.31
PD5: J201.25 U200.B8 | length 24.1
  Layer 1 w0.2: v3(25.4,27) 25.4,28.975 32.025,35.6 32.025,47.025 J201.25
PD6: J201.26 U200.B9 | length 22
  Layer 1 w0.2: v3(25.8,27) 25.8,28.7 33,35.9 J201.26
PD7: J201.17 U200.A10 | length 21.9
  Top Layer w0.2: J201.17 24.025,47.025 24.025,39.825 26.2,37.65 U200.A10
PD8: J202.2 U200.A12 | length 31.5
  Top Layer w0.2: U200.A12 27,30.56 26.994,30.566 26.994,39.119 28.875,41 J202.2
PD9: J202.1 U200.A13 | length 32.9
  Top Layer w0.2: U200.A13 27.4,38.716 28.67,39.986 46.986,39.986 J202.1
PD11: J202.11 U200.E13 | length 25.4
  Top Layer w0.2: U200.E13 27.89,25.8 29.064,26.974 29.064,30.098 30.941,31.975 47.025,31.975 J202.11
PD13: J202.17 U200.H11 | length 24.5
  Layer 2 w0.2: v4(26.6,24.6) 28.3,24.6 31.45,27.75 34.406,27.75 35.145,28.489 42.085,28.489 44.599,25.975 47.025,25.975 J202.17
PD14: J202.32 U200.J12 | length 29.2
  Layer 1 w0.2: v3(27,24.2) 34.825,24.2 36.176,22.849 36.176,14.84 36.811,14.205 42.795,14.205 J202.32
PD17: J202.31 U200.M13 | length 25.6
  Top Layer w0.2: U200.M13 29.704,23 40.729,11.975 47.025,11.975 J202.31
PD23: J203.32 U200.N7 | length 30.6
  Top Layer w0.2: U200.N7 25,20.55 30.207,15.343 30.207,9.518 32.632,7.093 38.462,7.093 39.975,5.58 39.975,2.975 J203.32
PD24: J203.34 U200.K7 | length 28.7
  Bottom Layer w0.2: v5(25,23.8) 25,23.375 25.375,23 25.8,23 37.975,10.825 37.975,6.73 40.025,4.68 40.025,2.975 J203.34
PD29: J202.3 U200.B13 | length 27.8
  Top Layer w0.2: U200.B13 27.406,27.006 27.641,27.006 27.8,27.165 27.8,31.025 34.75,37.975 46.975,37.975 J202.3
PD30: J200.26 U200.L2 | length 26.5
  Layer 1 w0.2: J200.26 2.975,16.025 6.458,16.025 7.75,17.317 7.75,20.825 9.766,22.841 21.04,22.841 21.599,23.4 v3(23,23.4)
PE0: J200.1 U200.C2 | length 26.3
  Layer 1 w0.2: J200.1 5.571,41 16.174,30.398 16.174,28.112 17.685,26.6 v3(23,26.6)
PE1: J200.2 U200.D2 | length 28.5
  Layer 1 w0.2: J200.2 3.014,39.986 5.95,39.986 15.729,30.207 15.729,27.896 17.425,26.2 v3(23,26.2)
PE2: J200.8 U200.D1 | length 25.1
  Top Layer w0.2: J200.8 3,36 8.081,36 17.881,26.2 U200.D1
PE3: J200.7 U200.F1 | length 22.8
  Top Layer w0.2: J200.7 8.325,35 18.15,25.175 20.857,25.175 21.082,25.4 U200.F1
PE4: J200.25 U200.K2 | length 23.6
  Layer 1 w0.2: J200.25 6.332,17 7.276,17.944 7.276,21.026 9.472,23.222 20.903,23.222 21.481,23.8 v3(23,23.8)
PE5: J203.12 U200.K3 | length 25.9
  Layer 2 w0.2: J203.12 18.025,2.975 18.025,6.194 16.579,7.64 16.579,13.879 22.587,19.887 22.587,23.476 22.911,23.8 v4(23.4,23.8)
QCS: J200.33 U200.N10 | length 62.4
  Top Layer w0.2: U200.N10 26.2,21.514 26.778,20.936 28.205,20.936 35,14.141 v2(35,7.601)
  Bottom Layer w0.2: J200.33 6.714,9 7.525,9.811 7.525,14.797 9.078,16.35 30.173,16.35 35,11.523 v2(35,7.601)
QIO0: J200.32 U200.M4 | length 30.6
  Layer 1 w0.2: v1(6.45,12) 6.45,12.403 6.982,12.935 10.285,12.935 12.475,15.125 19.325,15.125 23.8,19.6 v3(23.8,23)
  Layer 2 w0.2: J200.32 2.986,10.014 5.696,10.014 6.494,10.812 6.494,12 v1(6.45,12)
QIO1: J200.34 U200.N11 | length 58.1
  Top Layer w0.2: U200.N11 26.6,22.003 27.286,21.317 28.429,21.317 35.975,13.771 v2(35.975,11.411)
  Bottom Layer w0.2: J200.34 3.012,10.012 6.075,10.012 7.125,11.062 7.125,15.126 9.399,17.4 29.986,17.4 v2(35.975,11.411)
QIO2: J200.31 U200.J4 | length 30.6
  Bottom Layer w0.2: J200.31 5.95,12.95 5.95,22.079 6.721,22.85 19.525,22.85 20.659,23.984 23.349,23.984 23.546,24.181 23.781,24.181 v5(23.8,24.2)
QIO3: J200.29 U200.C3 | length 42.4
  Layer 2 w0.2: J200.29 6.142,13 7.974,14.832 v1(7.974,28.566) ; v1(7.982,34.017) 15.729,34.017 23.127,26.619 23.381,26.619 v4(23.4,26.6)
  Bottom Layer w0.2: v1(7.974,28.566) 7.978,28.57 7.978,34.013 v1(7.982,34.017)
QSCK: J200.30 U200.M6 | length 30.6
  Layer 1 w0.2: J200.30 2.975,12.025 5.082,12.025 6.107,11 9.825,11 12.95,14.125 19.55,14.125 24.6,19.175 v3(24.6,23)
RESET: C219.1 J205.4 R206.2 U200.K12 | length 16.9
  Top Layer w0.2: v2(34.779,23.349) 36.049,24.619 J205.4 40.961,24.619 41.36,24.221 C219.1 R206.2
  Layer 1 w0.2: v3(27,23.8) 34.328,23.8 v2(34.779,23.349)
RTS0: J200.19 U200.L1 | length 18.8
  Top Layer w0.2: J200.19 4.222,23.222 21.548,23.222 21.726,23.4 U200.L1
RTS1: J203.27 U200.N8 | length 23.5
  Top Layer w0.2: U200.N8 25.4,21.044 26.27,20.174 27.876,20.174 33,15.05 v2(33.001,7.728) v2(33.001,7.728)
  Layer 1 w0.2: v2(33.001,7.728) 35,5.729 J203.27
RTS2: J203.28 U200.M11 | length 24.5
  Layer 1 w0.2: v3(26.6,23) 26.6,12.605 34.025,5.18 34.025,2.975 J203.28
RXD0: J200.16 U200.H2 | length 22.5
  Layer 1 w0.2: J200.16 2.984,26.016 5.569,26.016 7.601,23.984 20.682,23.984 21.298,24.6 v3(23,24.6)
RXD1: J203.19 U200.M1 | length 37.3
  Top Layer w0.2: U200.M1 21.857,23 21.698,22.841 14.84,22.841 13.824,21.825 13.824,12.935 16.579,10.18 16.579,7.386 18.396,5.569 26.524,5.569 27,5.093 J203.19
RXD2: J203.20 U200.D11 | length 66.6
  Top Layer w0.2: v2(43.25,28.525) 43.25,30.384 v2(43.761,30.895)
  Layer 1 w0.2: v1(36.303,5.696) 41.764,5.696 v2(42.526,6.458)
  Layer 2 w0.2: v4(26.6,26.2) 26.619,26.219 26.749,26.219 27.032,26.502 27.032,28.957 29.806,31.731 42.907,31.731 43.743,30.895 v2(43.761,30.895)
  Bottom Layer w0.2: J203.20 28.025,3.025 28.025,4.657 29.064,5.696 v1(36.303,5.696) ; v2(42.526,6.458) 42.526,9.76 41.129,11.157 41.129,28.048 41.606,28.525 v2(43.25,28.525)
SCL0: J202.20 R208.1 U200.L12 | length 29
  Layer 1 w0.2: v3(27,23.4) 33.712,23.4 34.525,22.587 v2(35.287,22.587)
  Bottom Layer w0.2: v2(35.287,22.587) 35.715,23.015 R208.1 35.715,26.952 37.91,29.147 43.495,29.147 44.346,28.296 44.346,24.654 J202.20
SCL2: J203.5 R210.1 U200.M12 | length 37
  Top Layer w0.2: J203.5 R210.1
  Layer 1 w0.2: v3(27,23) 27,12.995 v2(28.048,11.947)
  Bottom Layer w0.2: J203.5 13,11.222 13.725,11.947 v2(28.048,11.947)
SDA0: J202.19 R209.1 U200.G11 | length 34.4
  Layer 2 w0.2: v4(26.6,25) 27.286,25 28.175,25.889 28.175,27.423 28.902,28.15 33.992,28.15 v1(34.906,29.064)
  Bottom Layer w0.2: v1(34.906,29.064) 35.715,29.873 R209.1 43.898,32.264 44.812,31.35 44.812,24.824 45.601,24.036 46.964,24.036 J202.19
SDA2: J203.6 R211.1 U200.M5 | length 40.2
  Top Layer w0.2: R211.1 11.284,5.823 11.975,5.132 11.975,3.025 J203.6
  Layer 1 w0.2: v1(9.259,11.799) 9.266,11.792 9.857,11.792 12.69,14.625 19.4,14.625 24.2,19.425 v3(24.2,23)
  Bottom Layer w0.2: v1(9.259,11.799) 11.785,11.799 12.036,11.548 12.036,2.964 J203.6
SPI0_MISO: J203.3 U200.K9 | length 65.8
  Layer 1 w0.2: v2(27.878,13.804) 29.592,13.804 34.652,8.744 v2(39,8.744)
  Bottom Layer w0.2: J203.3 8.325,6.675 8.325,14.25 9.518,15.443 26.239,15.443 v2(27.878,13.804) ; v5(25.8,23.8) 25.819,23.781 25.819,23.546 39,10.365 v2(39,8.744)
SPI0_MOSI: J203.1 U200.L9 | length 30.8
  Layer 1 w0.2: J203.1 9,5.085 14.394,10.478 19.241,10.478 v2(20.118,11.355)
  Layer 2 w0.2: v2(20.118,11.355) 22.785,11.355 25.8,14.37 v4(25.8,23.4)
SPI0_NPCS1: J203.4 U200.L6 | length 29.5
  Layer 1 w0.2: J203.4 11.975,2.975 11.975,6.895 14.205,9.125 v2(18.396,9.125)
  Layer 2 w0.2: v2(18.396,9.125) 18.396,13.268 24.6,19.472 v4(24.6,23.4)
SPI0_SPCK: J203.2 U200.N9 | length 63
  Top Layer w0.2: U200.N9 25.8,21.279 26.524,20.555 28.045,20.555 33.975,14.625 v2(33.975,8.49)
  Bottom Layer w0.2: J203.2 7.925,3.075 7.925,14.475 9.375,15.925 29.925,15.925 33.975,11.875 v2(33.975,8.49)
SPI1_MISO: J200.4 U200.F4 | length 34
  Bottom Layer w0.2: J200.4 2.975,38.025 7.53,38.025 9.379,36.176 9.379,26.571 11.712,24.238 19.063,24.238 19.825,25 22.981,25 23.381,25.4 v5(23.8,25.4)
SPI1_MOSI: J200.3 U200.F3 | length 28.3
  Layer 2 w0.2: J200.3 5.613,39 6.405,38.208 6.405,33.562 15.221,24.746 20.682,24.746 21.336,25.4 v4(23.4,25.4)
SPI1_NPCS0: J201.20 U200.C6 | length 20.4
  Layer 2 w0.2: v4(24.6,26.6) 24.6,30.75 27,33.15 J201.20
SPI1_NPCS1: J202.29 U200.L13 | length 24.9
  Top Layer w0.2: U200.L13 29.9,23.4 39.325,13.975 47.025,13.975 J202.29
SPI1_NPCS2: J202.15 U200.G13 | length 22.2
  Top Layer w0.2: U200.G13 35.225,25 36.114,25.889 40.367,25.889 41.383,26.905 41.383,26.938 43.89,26.938 44.803,26.025 47.025,26.025 J202.15
SPI1_SPCK: J201.33 U200.D7 | length 29.5
  Layer 2 w0.2: v1(28,33.825) 28.237,33.825 37.785,43.373 v1(37.785,43.741)
  Bottom Layer w0.2: v5(25,26.2) 25,26.651 25.508,27.159 25.508,31.333 v1(28,33.825) ; v1(37.785,43.741) 39.423,43.741 40.036,44.354 40.036,47.036 J201.33
SWDCLK: J205.3 R205.1 U200.H13 | length 15.5
  Top Layer w0.2: U200.H13 32.258,24.6 34.779,22.079 J205.3 40.24,20.936 R205.1
SWDIO: J205.2 R207.1 U200.K11 | length 16.6
  Top Layer w0.2: J205.2 39.319,19.317 R207.1
  Layer 2 w0.2: v4(26.6,23.8) 32.55,23.8 36.811,19.539 J205.2
TXD0: J200.15 U200.H1 | length 19.8
  Top Layer w0.2: J200.15 11.189,27 13.839,24.35 21.048,24.35 21.298,24.6 U200.H1
TXD1: J203.17 U200.C13 | length 65.9
  Top Layer w0.2: U200.C13 27.406,26.606 27.718,26.606 28.25,27.137 28.25,30.8 30.959,33.509 41.044,33.509 v1(41.51,33.975)
  Layer 1 w0.2: v1(41.51,33.975) 40.875,33.34 40.875,25.381 42.272,23.984 v2(44.177,23.984)
  Layer 2 w0.2: v2(37.192,7.982) 37.192,8.617 44.177,15.602 v2(44.177,23.984)
  Bottom Layer w0.2: J203.17 25.116,4.116 25.116,5.05 26.651,6.585 36.684,6.585 37.192,7.093 v2(37.192,7.982)
TXD2: J203.18 U200.K10 | length 40.6
  Layer 2 w0.2: v1(27.529,5.789) 34.745,5.789 36.049,7.093 v2(40.025,7.093)
  Bottom Layer w0.2: J203.18 26.025,3.025 26.025,4.81 26.979,5.764 27.504,5.764 v1(27.529,5.789) ; v5(26.2,23.8) 40.025,9.975 v2(40.025,7.093)
URXD0: J204.2 U200.L11 | length 15.9
  Layer 2 w0.2: J204.2 22.968,10.079 26.6,13.711 v4(26.6,23.4)
URXD1: J202.34 U200.N13 | length 24.2
  Top Layer w0.2: U200.N13 28.416,22.6 42.016,9 J202.34
UTXD0: J204.1 U200.M10 | length 14.3
  Layer 1 w0.2: J204.1 25.508,10.58 26.2,11.272 v3(26.2,23)
UTXD1: J202.33 U200.M7 | length 43.4
  Layer 1 w0.2: v2(19.92,12.554) 19.92,13.824 25,18.904 v3(25,23) ; v2(32.493,11.792) 34.906,9.379 40.24,9.379 42.145,7.474 46.474,7.474 J202.33
  Bottom Layer w0.2: v2(19.92,12.554) 31.731,12.554 v2(32.493,11.792)
VBG: C212.2 R203.2 U200.A3 | length 4.8
  Top Layer w0.15: C212.2 R203.2 22.968,30.214 22.968,28.789 23.4,28.357 U200.A3
VDD_3.3V: C201.1 C202.1 C203.1 C205.1 C206.1 J201.7 J201.8 J201.9 J201.10 J205.1 L203.2 R202.2 R205.2 R206.1 R207.2 R208.2 R209.2 R210.2 R211.2 U200.B4 U200.C1 U200.D6 U200.F10 U200.K6 | length 160.3
  Top Layer w0.2: 21.123,26.702 21.225,26.6 U200.C1
  Top Layer w0.5: v2(19.8,28.15) 19.8,28.025 21.123,26.702
  Top Layer w0.8: R211.2 14.117,8.791 14.65,8.258 v6(14.65,6.7) ; v6(27.794,19.158) 31.35,15.602 v6(31.35,9.633) ; v6(33.89,30.842) 33.89,26.535 v6(33.9,26.525) ; J205.1 42.716,16.999 43.185,17.468 R207.2 R206.1
  Layer 1 w0.8: v6(14.65,6.7) 14.662,6.712 28.683,6.712 28.81,6.839 v6(28.81,7.601)
  Layer 2 w0.8: v6(27.794,19.158) 29.953,16.999 J205.1
  Bottom Layer w0.254: C202.1 22.941,28.67 23.314,28.297 23.314,28.006 23.791,27.529 23.791,27.009 v5(23.8,27) ; C206.1@24.493,21.919 24.6,22.026 v5(24.6,23.8) 24.6,25.019 ; C203.1@24.6,28.67 v5(24.6,26.2) 24.6,25.019 ; v5@26.2,25.4 26.825,25.4 26.968,25.543 27.967,25.543 28.34,25.916 C205.1 ; v5(26.2,25.404) 26.196,25.4 24.981,25.4 24.6,25.019
  Bottom Layer w0.5: 19.679,28.416 19.8,28.295 v2(19.8,28.15)
  Bottom Layer w0.508: C201.1 C202.1 ; C202.1@22.941,28.67 C203.1
  Bottom Layer w0.762: L203.2 13.445,25.254 12.023,26.677 R202.2 12.023,29.605 12.497,30.08 18.015,30.08 19.425,28.67 19.743,28.67 C201.1
  Bottom Layer w0.8: C206.1@24.493,21.919 24.672,21.74 25.72,21.74 26.487,20.973 26.487,20.465 v6(27.794,19.158) ; C205.1 28.44,26.116 28.44,26.817 29.163,27.54 33.16,27.54 33.9,26.8 v6(33.9,26.525) 33.89,26.515 R208.2 33.89,19.63 36.521,16.999 J205.1 ; v6(28.81,7.601) 30.842,9.633 v6(31.35,9.633)
  Bottom Layer w1: J201.9 J201.7 J201.8 J201.10 17,35.492 17.586,34.906 33.304,34.906 33.89,34.32 R209.2 v6(33.89,30.842)
VDDOUT: C207.1 C213.1 C214.1 L201.2 L202.2 U200.D5 U200.E4 U200.G10 U200.K5 | length 28.5
  Top Layer w0.8: v6(32.481,28.95) 32.481,26.544 v6(32.5,26.525)
  Layer 2 w0.254: v5(23.8,25.8) 23.809,25.791 23.962,25.791 24.2,25.553 24.2,25 ; v5(24.2,23.8) 24.2,25 ; v5(26.2,25) 24.2,25
  Bottom Layer w0.254: L201.2 23.279,25.762 23.317,25.8 v5(23.8,25.8) v5(24.2,26.2) ; C214.1 23.146,22.173 23.146,22.587 24.191,23.632 24.191,23.791 v5(24.2,23.8) ; v5(26.2,25) 26.932,25 27.176,24.756 27.87,24.756 C213.1@28.007,24.619
  Bottom Layer w0.5: C213.1@28.007,24.619 28.59,24.036 28.59,23.388 28.883,23.095 31.395,23.095
  Bottom Layer w0.8: C207.1 C214.1 ; L202.2@27.921,30.233 31.199,30.233 v6(32.481,28.95) ; 31.395,23.095 32.5,24.2 v6(32.5,26.525)
VDDPLL: C209.2 L202.1 U200.D8 | length 4.3
  Bottom Layer w0.254: v5(25.4,26.2) 25.409,26.209 25.409,26.425 26.143,27.159 26.143,28.297 C209.2@26.516,28.67 ; C209.2 L202.1
VDDPLLUSB: C204.1 L200.1 U200.D4 | length 10.3
  Layer 2 w0.254: v2(17.3,27.985) 17.388,28.073 19.261,26.2 v4(23.8,26.2)
  Bottom Layer w0.254: C204.1 16.771,27.456 v2(17.3,27.985) 17.214,27.985 L200.1
  Bottom Layer w0.75: C204.1@16.771,27.456 L200.1
VDDUTMIC: C211.1 L201.1 U200.C4 | length 3.8
  Bottom Layer w0.254: L201.1 21.571,25.762 21.698,25.889 21.698,26.232 C211.1@22.473,27.007 ; C211.1@22.473,27.032 C211.1@22.473,27.007 ; v5(23.8,26.6) 22.945,26.6 22.861,26.684 22.796,26.684 C211.1@22.473,27.007
XIN: C218.2 U200.A2 X200.1 | length 10.8
  Top Layer w0.2: C218.2@19.115,35.541 X200.1 19.943,33.851 20.06,33.734 20.06,29.761 20.31,29.511 21.296,29.511 23,27.807 U200.A2
XIN32: C217.2 U200.N1 X201.2 | length 6.1
  Top Layer w0.2: X201.2 C217.2 21.698,21.698 U200.N1
XOUT: C220.2 U200.B2 X200.3 | length 9.7
  Top Layer w0.2: C220.2@16.834,30.415 16.834,32.07 X200.3
  Layer 1 w0.15: v2(16.834,31.265) 18.735,31.265 v3(23,27)
XOUT32: C216.2 U200.N2 X201.1 | length 10.1
  Top Layer w0.2: C216.2 X201.1 20.809,17.38 23,19.571 U200.N2
pads on no net: Fid1.Un1 Fid2.Un1 Fid3.Un1 U200.J13

## Polygon pours and split planes (outlines as drawn)
GND on Layer 1 "GND_L02_P001" (solid, remove dead copper, pour order 1): 0,50 0,0 50,0 50,50
GND on Layer 2 "GND_L03_P002" (solid, remove dead copper, pour order 2): 0,50 0,0 50,0 50,50
GND on Bottom Layer "GND_L04_P003" (solid, remove dead copper, pour order 3): 0,50 0,0 50,0 50,50
GND on Top Layer "GND_L01_P000" (solid, remove dead copper, pour order 0): 0,50 0,0 50,0 50,50

## Keep-outs
Keep-Out Layer:
  the board outline again, w0.127

## Other copper
Top Layer:
  pour cut-out: 1.632,48.852 1.632,47.352 6.132,47.352 6.132,48.852
  text "1" at 1.959,47.679 h0.8
Layer 1:
  pour cut-out: 1.632,48.852 1.632,47.352 6.132,47.352 6.132,48.852
  text "2" at 2.848,47.679 h0.8
Layer 2:
  pour cut-out: 1.632,48.852 1.632,47.352 6.132,47.352 6.132,48.852
  text "3" at 4.118,47.679 h0.8
Bottom Layer:
  pour cut-out: 1.632,48.852 1.632,47.352 6.132,47.352 6.132,48.852
  text "4" at 5.261,47.679 h0.8

## Silkscreen, mask and mechanical layers (free items; w line width, h text height)
Top Overlay:
  circle w0.1: c40.995,13.344 r0.55
  circle w0.2: c35.135,16.393 r2.2
  rectangle: 30.015,8.346 30.939,12.478
  rectangle: 37.75,8.346 40.059,10.262
  rectangle: 32.232,7.422 39.136,8.634
  rectangle: 30.939,7.422 32.232,13.425
  rectangle: 32.232,12.201 39.874,13.425
  region: 30.015,8.346 30.015,8.255 30.051,8.076 30.12,7.908 30.221,7.757 30.35,7.628 30.501,7.527 30.669,7.458 30.848,7.422 30.939,7.422 30.939,8.346
  region: 30.962,13.425 30.869,13.425 30.686,13.389 30.514,13.317 30.359,13.214 30.227,13.082 30.123,12.927 30.052,12.755 30.015,12.572 30.015,12.478 30.962,12.478
  region: 40.059,8.346 40.059,8.255 40.023,8.076 39.954,7.908 39.853,7.757 39.724,7.628 39.573,7.527 39.405,7.458 39.226,7.422 39.136,7.422 39.136,8.346
  lines w0.2: 2.648,43.034 4.299,46.336 4.375,46.107 ; 2.839,43.034 4.41,46.177 4.496,45.917 3.06,43.043 ; 3.285,43.073 4.661,45.895 ; 3.47,43.03 4.753,45.645 ; 3.667,43.067 4.878,45.487 ; 3.864,43.037 4.97,45.314 ; 4.067,43.051 5.062,45.148 ; 4.262,43.033 5.158,44.954 ; 4.46,43.058 5.252,44.791 ; 4.653,43.068 5.327,44.598 ; 4.866,43.073 5.44,44.434 ; 5.069,43.058 5.549,44.251 ; 5.247,43.053 5.653,44.033 ; 5.431,43.043 5.751,43.834 ; 5.648,43.078 5.847,43.588 ; 5.822,43.117 5.95,43.415 ; 5.99,43.108 5.995,43.345 ; 32.935,16.392 37.335,16.393 ; 33.604,17.973 ccw(c35.127,19.5) 36.658,17.981 ; 33.606,14.797 cw(c35.136,13.278) 36.659,14.806 ; 35.127,18.584 cw(c33.532,16.392) 35.128,14.201 ; 35.135,18.592 35.136,14.192 ; 35.143,18.583 ccw(c36.738,16.393) 35.144,14.201 ; 2.521,43.034 6.204,43.034 4.299,46.59 2.521,43.034
  text "ATSAMS70Q20A-CFNT" at 13.489,41.953 h1.5
  text "Module V1.1" at 18.188,39.524 h1.5
  text "p" at 6.75,37.503 h6.5
  text "R" at 40.725,13.043 h1
  text "GND" at 19.358,6.531 h0.8
  text "RX" at 22.533,6.531 h0.8
  text "TX" at 25.073,6.531 h0.8
  text "Ganges Internationale" at 29.434,6.205 h1.2
Board Outline:
  the board outline again, w0.1